# Altium PCB 八入八出继电器工控板.PCBDOC (part 2 of 2)
Units mm, origin at the board's own origin, x right, y up, seen from the top; angles counter-clockwise.
Board outline 152.4 x 101.6 mm, 2 copper layers (Top Layer, Bottom Layer); 79 components, 86 nets, 285 pads, 7 vias.
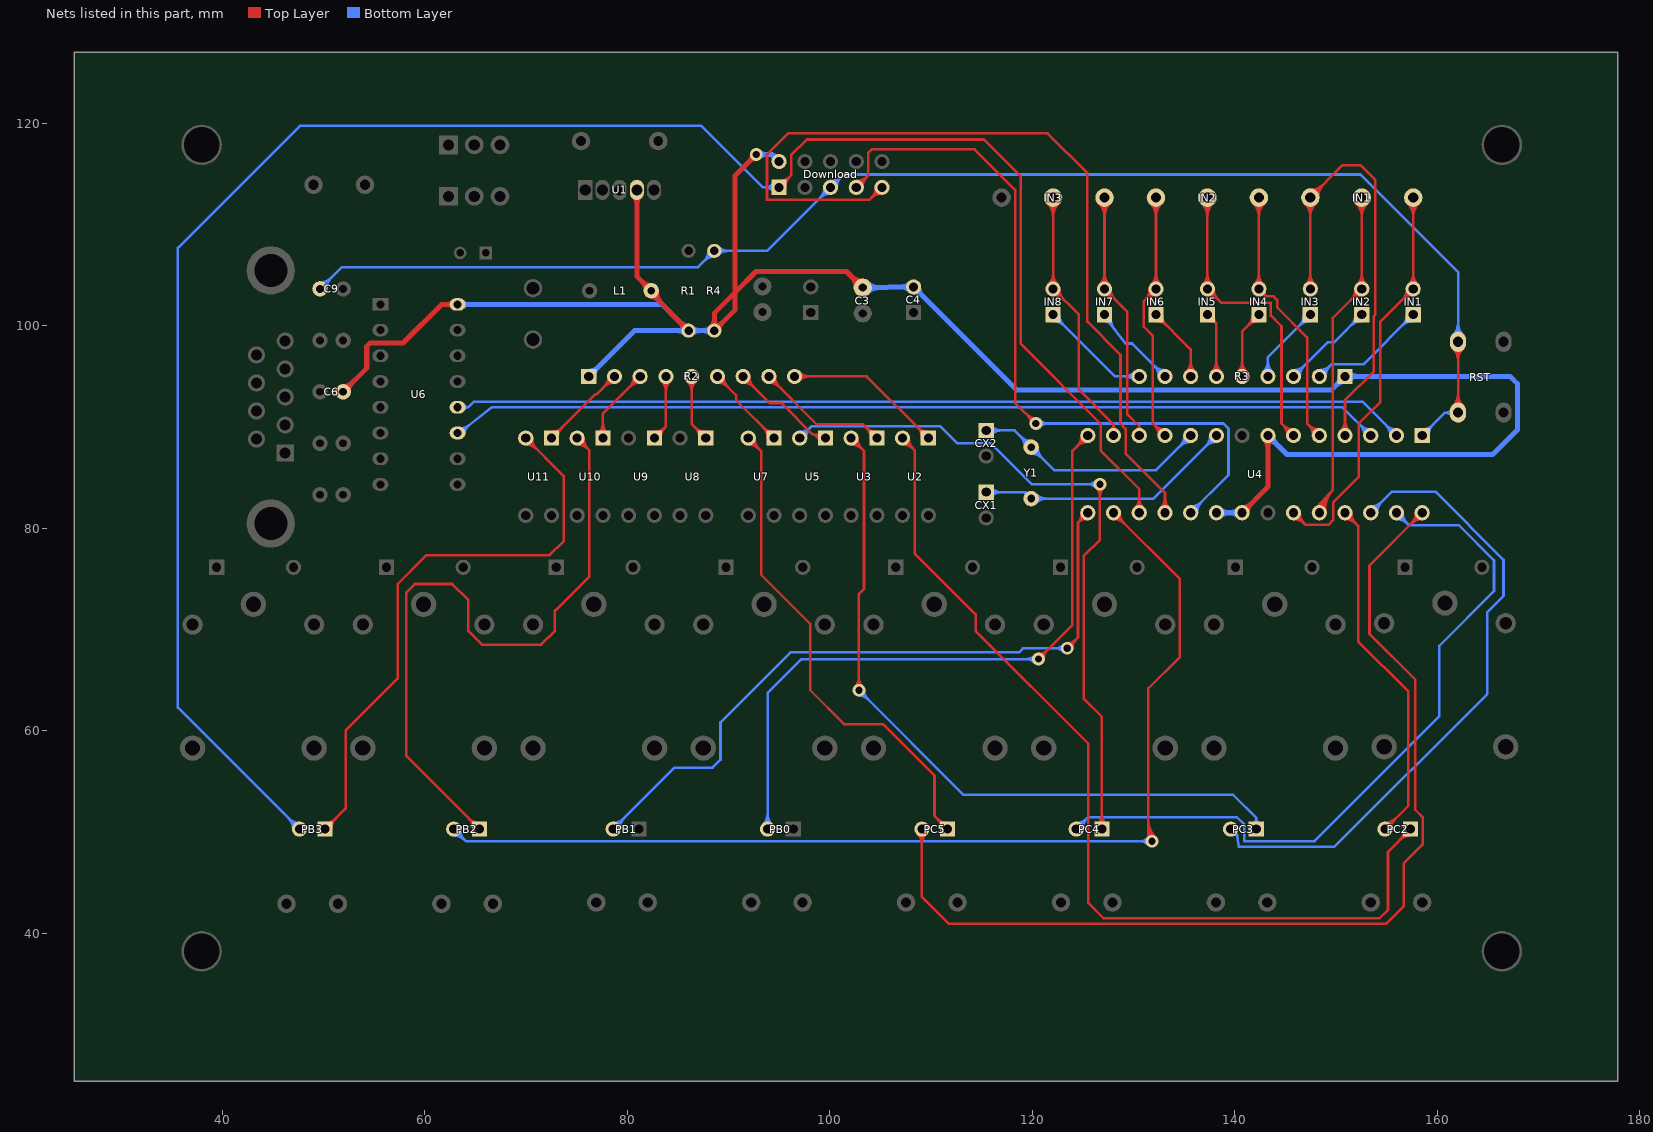
[diagram p2: the nets of this part, all layers, seen from the top]

## Via types
v1: diameter 1.27, hole 0.711, Top Layer to Bottom Layer, 7 vias

## Nets (pads, with @x,y where several pads share a name; then routed paths per layer and width w, separated by ;. In a path a pad name is that pad's centre, name@x,y a point inside that pad or via, vN(x,y) a via of type N, cw(c..) or ccw(c..) an arc to the next point about the centre after c; other vN are vias at no path point) (continued)
NetPB3_1: PB2.1 U10.2 | length 74.7
  Top Layer w0.254: PB2.1@64.782,50.292 ccw(c63.278,50.292) 64.341,51.356 ccw(c65.405,52.419) PB2.1@65.405,50.915 ; PB2.1@65.036,50.292 ccw(c64.145,50.292) 64.775,50.922 ccw(c65.405,51.552) PB2.1@65.405,50.661 ; PB2.1@65.405,50.292 58.191,57.506 58.191,73.66 59.03,74.498 62.713,74.498 64.313,72.898 64.313,69.85 65.659,68.504 71.501,68.504 72.847,69.85 72.847,71.831 76.251,75.235 76.251,87.706 U10.2@75.057,88.9 ; U10.2@75.057,88.277 cw(c75.057,86.773) 76.121,87.836 cw(c77.184,88.9) U10.2@75.68,88.9 ; U10.2@75.057,88.531 cw(c75.057,87.64) 75.687,88.27 cw(c76.317,88.9) U10.2@75.426,88.9
NetPB4_1: PB3.1 U11.2 | length 64.5
  Top Layer w0.254: PB3.1@50.165,50.292 52.197,52.324 52.197,60.02 57.328,65.151 57.328,74.473 60.198,77.343 72.339,77.343 73.711,78.715 73.711,85.166 U11.2@69.977,88.9 ; PB3.1@50.165,50.661 ccw(c50.165,51.552) 50.795,50.922 ccw(c51.425,50.292) PB3.1@50.534,50.292 ; PB3.1@50.165,50.915 ccw(c50.165,52.419) 51.229,51.356 ccw(c52.292,50.292) PB3.1@50.788,50.292 ; U11.2@69.977,88.277 cw(c69.977,86.773) 71.041,87.836 cw(c72.104,88.9) U11.2@70.6,88.9 ; U11.2@69.977,88.531 cw(c69.977,87.64) 70.607,88.27 cw(c71.237,88.9) U11.2@70.346,88.9
NetPC1_1: PC2.1 U2.2 | length 100.5
  Top Layer w0.254: U2.2@107.188,88.277 cw(c107.188,86.773) 108.252,87.836 cw(c109.315,88.9) U2.2@107.811,88.9 ; U2.2@107.188,88.531 cw(c107.188,87.64) 107.818,88.27 cw(c108.448,88.9) U2.2@107.557,88.9 ; U2.2@107.188,88.9 108.382,87.706 108.382,77.521 114.402,71.501 114.402,69.85 125.527,58.725 125.527,42.977 127,41.504 154.305,41.504 155.118,42.316 155.118,48.057 PC2.1@157.353,50.292 ; PC2.1@156.73,50.292 cw(c155.226,50.292) 156.289,49.228 cw(c157.353,48.165) PC2.1@157.353,49.669 ; PC2.1@156.984,50.292 cw(c156.093,50.292) 156.723,49.662 cw(c157.353,49.032) PC2.1@157.353,49.923
NetPC2_1: PC3.1 U3.2 | length 80.2
  Top Layer w0.254: U3.2@102.108,88.277 cw(c102.108,86.773) 103.172,87.836 cw(c104.235,88.9) U3.2@102.731,88.9 ; U3.2@102.108,88.531 cw(c102.108,87.64) 102.738,88.27 cw(c103.368,88.9) U3.2@102.477,88.9 ; U3.2@102.108,88.9 103.378,87.63 103.378,74.016 102.87,73.508 v1(102.87,64.008) ; v1@102.511,64.367 ccw(c101.644,65.234) 102.87,65.234 ccw(c104.096,65.234) v1@103.229,64.367
  Bottom Layer w0.254: v1@102.87,63.5 cw(c102.87,62.274) 103.737,63.141 cw(c104.604,64.008) v1@103.378,64.008 ; v1(102.87,64.008) 113.208,53.67 139.838,53.67 142.113,51.395 ; PC3.1@141.791,50.826 ccw(c141.448,51.395) 142.113,51.395 ; PC3.1@142.113,50.292 142.113,51.395 ; PC3.1@142.435,50.826 cw(c142.778,51.395) 142.113,51.395
NetPC3_1: PC4.1 U5.2 | length 79.4
  Top Layer w0.254: v1@126.311,83.994 cw(c125.443,83.127) 126.67,83.127 cw(c127.896,83.127) v1@127.029,83.994 ; PC4.1@126.432,50.733 ccw(c125.369,51.796) 126.873,51.796 ccw(c128.377,51.796) PC4.1@127.314,50.733 ; PC4.1@126.612,50.553 ccw(c125.982,51.183) 126.873,51.183 ccw(c127.764,51.183) PC4.1@127.134,50.553 ; v1(126.67,84.353) 126.67,78.842 125.07,77.241 125.07,63.195 126.873,61.392 PC4.1@126.873,50.292
  Bottom Layer w0.254: U5.2@97.028,88.9 98.222,90.094 110.896,90.094 112.598,88.392 115.9,88.392 119.939,84.353 v1(126.67,84.353) ; U5.2@97.028,89.269 ccw(c97.028,90.16) 97.658,89.53 ccw(c98.288,88.9) U5.2@97.397,88.9 ; U5.2@97.028,89.523 ccw(c97.028,91.027) 98.092,89.964 ccw(c99.155,88.9) U5.2@97.651,88.9 ; v1@126.311,83.994 ccw(c125.443,83.127) 125.443,84.353 ccw(c125.443,85.58) v1@126.311,84.713
NetPC4_1: PC5.1 U7.2 | length 56.5
  Top Layer w0.254: U7.2@91.948,88.277 cw(c91.948,86.773) 93.012,87.836 cw(c94.075,88.9) U7.2@92.571,88.9 ; U7.2@91.948,88.531 cw(c91.948,87.64) 92.578,88.27 cw(c93.208,88.9) U7.2@92.317,88.9 ; U7.2@91.948,88.9 93.218,87.63 93.218,75.413 98.069,70.561 98.069,64.008 101.422,60.655 105.258,60.655 110.338,55.575 110.338,51.587 PC5.1@111.633,50.292 ; PC5.1@111.01,50.292 ccw(c109.506,50.292) 110.569,51.356 ccw(c111.633,52.419) PC5.1@111.633,50.915 ; PC5.1@111.264,50.292 ccw(c110.373,50.292) 111.003,50.922 ccw(c111.633,51.552) PC5.1@111.633,50.661
NetPD1_1: IN1.1@157.607,101.092 R3.2 | length 19.3
  Bottom Layer w0.254: R3.2@148.336,94.996 149.53,96.19 152.705,96.19 IN1.1@157.607,101.092 ; R3.2@148.336,95.365 ccw(c148.336,96.256) 148.966,95.626 ccw(c149.596,94.996) R3.2@148.705,94.996 ; R3.2@148.336,95.619 ccw(c148.336,97.123) 149.4,96.06 ccw(c150.463,94.996) R3.2@148.959,94.996 ; IN1.1@156.984,101.092 cw(c155.48,101.092) 156.543,100.028 cw(c157.607,98.965) IN1.1@157.607,100.469 ; IN1.1@157.238,101.092 cw(c156.347,101.092) 156.977,100.462 cw(c157.607,99.832) IN1.1@157.607,100.723
NetPD2_1: IN2.1@152.527,101.092 R3.3 | length 16.8
  Bottom Layer w0.254: R3.3@145.796,94.996 149.149,98.349 149.784,98.349 IN2.1@152.527,101.092 ; R3.3@145.796,95.365 ccw(c145.796,96.256) 146.426,95.626 ccw(c147.056,94.996) R3.3@146.165,94.996 ; R3.3@145.796,95.619 ccw(c145.796,97.123) 146.86,96.06 ccw(c147.923,94.996) R3.3@146.419,94.996 ; IN2.1@151.904,101.092 cw(c150.4,101.092) 151.463,100.028 cw(c152.527,98.965) IN2.1@152.527,100.469 ; IN2.1@152.158,101.092 cw(c151.267,101.092) 151.897,100.462 cw(c152.527,99.832) IN2.1@152.527,100.723
NetPD3_1: IN3.1@147.447,101.092 R3.4 | length 15.4
  Bottom Layer w0.254: R3.4@142.815,95.437 ccw(c141.752,96.5) 143.256,96.5 ccw(c144.76,96.5) R3.4@143.697,95.437 ; R3.4@142.995,95.257 ccw(c142.365,95.887) 143.256,95.887 ccw(c144.147,95.887) R3.4@143.517,95.257 ; R3.4@143.256,94.996 143.256,96.901 IN3.1@147.447,101.092 ; IN3.1@146.824,101.092 cw(c145.32,101.092) 146.383,100.028 cw(c147.447,98.965) IN3.1@147.447,100.469 ; IN3.1@147.078,101.092 cw(c146.187,101.092) 146.817,100.462 cw(c147.447,99.832) IN3.1@147.447,100.723
NetPD4_1: IN4.1 R3.5 | length 14.3
  Top Layer w0.254: R3.5@140.275,95.437 ccw(c139.212,96.5) 140.716,96.5 ccw(c142.22,96.5) R3.5@141.157,95.437 ; R3.5@140.455,95.257 ccw(c139.825,95.887) 140.716,95.887 ccw(c141.607,95.887) R3.5@140.977,95.257 ; R3.5@140.716,94.996 140.716,99.441 IN4.1@142.367,101.092 ; IN4.1@141.744,101.092 cw(c140.24,101.092) 141.303,100.028 cw(c142.367,98.965) IN4.1@142.367,100.469 ; IN4.1@141.998,101.092 cw(c141.107,101.092) 141.737,100.462 cw(c142.367,99.832) IN4.1@142.367,100.723
NetPD5_1: IN5.1 R3.6 | length 12
  Top Layer w0.254: IN5.1@137.287,101.092 138.176,100.203 ; IN5.1@137.371,100.475 cw(c137.499,99.526) 138.176,100.203 ; R3.6@137.735,95.437 ccw(c136.672,96.5) 138.176,96.5 ccw(c139.68,96.5) R3.6@138.617,95.437 ; IN5.1@137.904,101.008 ccw(c138.853,100.88) 138.176,100.203 ; R3.6@137.915,95.257 ccw(c137.285,95.887) 138.176,95.887 ccw(c139.067,95.887) R3.6@138.437,95.257 ; R3.6@138.176,94.996 138.176,100.203
NetPD6_1: IN6.1 R3.7 | length 15
  Top Layer w0.254: IN6.1@132.207,100.469 cw(c132.207,98.965) 133.271,100.028 cw(c134.334,101.092) IN6.1@132.83,101.092 ; IN6.1@132.207,100.723 cw(c132.207,99.832) 132.837,100.462 cw(c133.467,101.092) IN6.1@132.576,101.092 ; IN6.1@132.207,101.092 135.636,97.663 R3.7@135.636,94.996 ; R3.7@135.195,95.437 ccw(c134.132,96.5) 135.636,96.5 ccw(c137.14,96.5) R3.7@136.077,95.437 ; R3.7@135.375,95.257 ccw(c134.745,95.887) 135.636,95.887 ccw(c136.527,95.887) R3.7@135.897,95.257
NetPD7_1: IN7.1 R3.8 | length 15.9
  Bottom Layer w0.254: IN7.1@127.051,100.474 cw(c126.913,99.352) 127.804,100.048 ; IN7.1@127.127,101.092 127.127,100.914 129.21,98.247 129.845,98.247 R3.8@133.096,94.996 ; IN7.1@127.493,101.047 ccw(c128.749,100.893) 127.752,100.114 ; IN7.1@127.745,101.016 ccw(c129.609,100.787) 128.129,99.631 ; R3.8@132.473,94.996 ccw(c130.969,94.996) 132.032,96.06 ccw(c133.096,97.123) R3.8@133.096,95.619 ; R3.8@132.727,94.996 ccw(c131.836,94.996) 132.466,95.626 ccw(c133.096,96.256) R3.8@133.096,95.365
NetPD8_1: IN8.1 R3.9 | length 18.6
  Bottom Layer w0.254: IN8.1@122.047,100.469 cw(c122.047,98.965) 123.111,100.028 cw(c124.174,101.092) IN8.1@122.67,101.092 ; IN8.1@122.047,100.723 cw(c122.047,99.832) 122.677,100.462 cw(c123.307,101.092) IN8.1@122.416,101.092 ; IN8.1@122.047,101.092 128.143,94.996 R3.9@130.556,94.996 ; R3.9@130.115,94.555 ccw(c129.052,93.492) 129.052,94.996 ccw(c129.052,96.5) R3.9@130.115,95.437 ; R3.9@130.295,94.735 ccw(c129.665,94.105) 129.665,94.996 ccw(c129.665,95.887) R3.9@130.295,95.257
PB0: PB0.2 U4.14 | length 77
  Top Layer w0.254: v1(120.599,67.081) 123.952,70.434 123.952,87.63 U4.14@125.476,89.154 ; v1@120.599,67.589 ccw(c120.599,68.816) 121.466,67.949 ccw(c122.334,67.081) v1@121.107,67.081 ; U4.14@124.853,89.154 cw(c123.349,89.154) 124.412,88.09 cw(c125.476,87.027) U4.14@125.476,88.531 ; U4.14@125.107,89.154 cw(c124.216,89.154) 124.846,88.524 cw(c125.476,87.894) U4.14@125.476,88.785
  Bottom Layer w0.254: PB0.2@93.412,50.733 ccw(c92.349,51.796) 93.853,51.796 ccw(c95.357,51.796) PB0.2@94.294,50.733 ; PB0.2@93.592,50.553 ccw(c92.962,51.183) 93.853,51.183 ccw(c94.744,51.183) PB0.2@94.114,50.553 ; PB0.2@93.853,50.292 93.853,63.729 97.206,67.081 v1(120.599,67.081) ; v1@120.24,66.722 ccw(c119.373,65.855) 119.373,67.081 ccw(c119.373,68.308) v1@120.24,67.441
PB1: PB1.2 U4.15 | length 79.5
  Top Layer w0.254: v1(123.444,68.148) 124.511,69.215 124.511,80.569 ; v1@123.444,68.656 ccw(c123.444,69.883) 124.311,69.015 ccw(c125.178,68.148) v1@123.952,68.148 ; U4.15@124.855,81.49 cw(c123.674,81.406) 124.511,80.569 ; U4.15@125.108,81.508 cw(c124.409,81.458) 124.904,80.962 cw(c125.4,80.467) U4.15@125.45,81.166 ; U4.15@125.432,80.913 ccw(c125.348,79.732) 124.511,80.569 ; U4.15@125.476,81.534 124.511,80.569
  Bottom Layer w0.254: PB1.2@78.613,50.292 84.684,56.363 88.417,56.363 89.205,57.15 89.205,60.833 96.114,67.742 118.669,67.742 119.075,68.148 v1(123.444,68.148) ; PB1.2@78.613,50.661 ccw(c78.613,51.552) 79.243,50.922 ccw(c79.873,50.292) PB1.2@78.982,50.292 ; PB1.2@78.613,50.915 ccw(c78.613,52.419) 79.677,51.356 ccw(c80.74,50.292) PB1.2@79.236,50.292 ; v1@123.085,67.789 ccw(c122.218,66.922) 122.218,68.148 ccw(c122.218,69.375) v1@123.085,68.507
PB2: PB2.2 U4.16 | length 120
  Top Layer w0.254: U4.16@128.016,80.911 cw(c128.016,79.407) 129.08,80.47 cw(c130.143,81.534) U4.16@128.639,81.534 ; U4.16@128.016,81.165 cw(c128.016,80.274) 128.646,80.904 cw(c129.276,81.534) U4.16@128.385,81.534 ; U4.16@128.016,81.534 134.569,74.981 134.569,67.31 131.445,64.186 131.445,49.479 v1(131.826,49.098) cw(c132.746,50.018) 131.445,50.018 ; 131.445,50.631 ccw(c133.359,50.631) v1@132.006,49.278 ; 131.445,51.244 ccw(c133.972,51.244) v1@132.185,49.457
  Bottom Layer w0.254: PB2.2@62.865,49.669 cw(c62.865,48.165) 63.929,49.228 cw(c64.992,50.292) PB2.2@63.488,50.292 ; PB2.2@62.865,49.923 cw(c62.865,49.032) 63.495,49.662 cw(c64.125,50.292) PB2.2@63.234,50.292 ; PB2.2@62.865,50.292 64.059,49.098 v1(131.826,49.098) ; v1@131.467,48.739 ccw(c130.6,47.872) 130.6,49.098 ccw(c130.6,50.325) v1@131.467,49.457
PB3: Download.1 PB3.2 U4.17 | length 210.8
  Top Layer w0.254: Download.1@94.996,113.665 96.19,114.859 96.19,116.84 97.739,118.389 115.214,118.389 118.86,114.744 118.86,98.208 126.746,90.322 126.746,87.681 130.556,83.871 U4.17@130.556,81.534 ; Download.1@94.996,114.034 ccw(c94.996,114.925) 95.626,114.295 ccw(c96.256,113.665) Download.1@95.365,113.665 ; Download.1@94.996,114.288 ccw(c94.996,115.792) 96.06,114.729 ccw(c97.123,113.665) Download.1@95.619,113.665 ; U4.17@130.115,81.975 ccw(c129.052,83.038) 130.556,83.038 ccw(c132.06,83.038) U4.17@130.997,81.975 ; U4.17@130.295,81.795 ccw(c129.665,82.425) 130.556,82.425 ccw(c131.447,82.425) U4.17@130.817,81.795
  Bottom Layer w0.254: PB3.2@47.002,50.292 ccw(c45.498,50.292) 46.561,51.356 ccw(c47.625,52.419) PB3.2@47.625,50.915 ; PB3.2@47.256,50.292 ccw(c46.365,50.292) 46.995,50.922 ccw(c47.625,51.552) PB3.2@47.625,50.661 ; PB3.2@47.625,50.292 35.636,62.281 35.636,107.696 47.676,119.736 87.319,119.736 93.39,113.665 Download.1@94.996,113.665 ; Download.1@94.555,113.224 ccw(c93.492,112.161) 93.492,113.665 ccw(c93.492,115.169) Download.1@94.555,114.106 ; Download.1@94.735,113.404 ccw(c94.105,112.774) 94.105,113.665 ccw(c94.105,114.556) Download.1@94.735,113.926
PB4: Download.9 U4.18 | length 94.7
  Top Layer w0.254: Download.9@104.533,113.665 cw(c103.029,113.665) 104.092,112.601 cw(c105.156,111.538) Download.9@105.156,113.042 ; Download.9@104.787,113.665 cw(c103.896,113.665) 104.526,113.035 cw(c105.156,112.405) Download.9@105.156,113.296 ; Download.9@105.156,113.665 103.937,112.446 93.802,112.446 93.802,116.916 95.885,118.999 121.514,118.999 125.425,115.087 125.425,100.406 128.702,97.13 128.702,90.322 129.21,89.814 129.21,87.376 133.096,83.49 U4.18@133.096,81.534 ; U4.18@132.655,81.975 ccw(c131.592,83.038) 133.096,83.038 ccw(c134.6,83.038) U4.18@133.537,81.975 ; U4.18@132.835,81.795 ccw(c132.205,82.425) 133.096,82.425 ccw(c133.987,82.425) U4.18@133.357,81.795
PB5: Download.7 U4.19 | length 84.6
  Top Layer w0.254: Download.7@102.616,113.665 103.81,114.859 103.81,117.094 104.14,117.424 114.3,117.424 118.306,113.418 118.306,92.387 v1(120.345,90.348) ; Download.7@102.616,114.034 ccw(c102.616,114.925) 103.246,114.295 ccw(c103.876,113.665) Download.7@102.985,113.665 ; Download.7@102.616,114.288 ccw(c102.616,115.792) 103.68,114.729 ccw(c104.743,113.665) Download.7@103.239,113.665 ; v1@119.837,90.348 ccw(c118.611,90.348) 119.478,91.215 ccw(c120.345,92.082) v1@120.345,90.856
  Bottom Layer w0.254: v1(120.345,90.348) 138.874,90.348 139.37,89.852 139.37,85.268 U4.19@135.636,81.534 ; v1@120.704,89.989 cw(c121.572,89.121) 121.572,90.348 cw(c121.572,91.574) v1@120.704,90.707 ; U4.19@135.636,81.903 ccw(c135.636,82.794) 136.266,82.164 ccw(c136.896,81.534) U4.19@136.005,81.534 ; U4.19@135.636,82.157 ccw(c135.636,83.661) 136.7,82.598 ccw(c137.763,81.534) U4.19@136.259,81.534
PB6: CX1.1 U4.9 Y1.2 | length 37.7
  Bottom Layer w0.254: CX1.1@115.443,83.566 119.253,83.566 ; CX1.1@115.704,83.305 cw(c116.334,82.675) 116.334,83.566 cw(c116.334,84.457) CX1.1@115.704,83.827 ; CX1.1@115.884,83.125 cw(c116.947,82.062) 116.947,83.566 cw(c116.947,85.07) CX1.1@115.884,84.007 ; Y1.2@119.315,83.205 ccw(c119.029,83.342) 119.253,83.566 ; Y1.2@119.614,83.504 cw(c119.477,83.79) 119.253,83.566 ; Y1.2@120.157,82.662 cw(c120.808,82.011) 120.808,82.931 cw(c120.808,83.851) Y1.2@120.157,83.2 ; Y1.2@120.337,82.482 cw(c121.421,81.398) 121.421,82.931 cw(c121.421,84.464) Y1.2@120.337,83.38 ; U4.9@137.553,89.154 cw(c136.049,89.154) 137.112,88.09 cw(c138.176,87.027) U4.9@138.176,88.531 ; U4.9@137.807,89.154 cw(c136.916,89.154) 137.546,88.524 cw(c138.176,87.894) U4.9@138.176,88.785 ; U4.9@138.176,89.154 131.953,82.931 Y1.2@119.888,82.931 119.253,83.566
PB7: CX2.1 U4.10 Y1.1 | length 38.5
  Bottom Layer w0.254: CX2.1@115.443,89.662 118.237,89.662 Y1.1@119.888,88.011 122.149,85.75 132.232,85.75 U4.10@135.636,89.154 ; CX2.1@115.704,89.401 cw(c116.334,88.771) 116.334,89.662 cw(c116.334,90.553) CX2.1@115.704,89.923 ; CX2.1@115.884,89.221 cw(c116.947,88.158) 116.947,89.662 cw(c116.947,91.166) CX2.1@115.884,90.103 ; Y1.1@119.253,88.011 ccw(c117.72,88.011) 118.804,89.095 ccw(c119.888,90.179) Y1.1@119.888,88.646 ; Y1.1@119.507,88.011 ccw(c118.587,88.011) 119.238,88.661 ccw(c119.888,89.312) Y1.1@119.888,88.392 ; Y1.1@119.888,87.376 cw(c119.888,85.843) 120.972,86.927 cw(c122.056,88.011) Y1.1@120.523,88.011 ; Y1.1@119.888,87.63 cw(c119.888,86.71) 120.538,87.361 cw(c121.189,88.011) Y1.1@120.269,88.011 ; U4.10@135.013,89.154 cw(c133.509,89.154) 134.572,88.09 cw(c135.636,87.027) U4.10@135.636,88.531 ; U4.10@135.267,89.154 cw(c134.376,89.154) 135.006,88.524 cw(c135.636,87.894) U4.10@135.636,88.785
PC0: IN1.1@157.607,112.649 IN1.2@157.607,103.632 U4.23 | length 56
  Top Layer w0.254: U4.23@145.796,80.911 cw(c145.796,79.407) 146.86,80.47 cw(c147.923,81.534) U4.23@146.419,81.534 ; U4.23@145.796,81.165 cw(c145.796,80.274) 146.426,80.904 cw(c147.056,81.534) U4.23@146.165,81.534 ; U4.23@145.796,81.534 146.99,80.34 149.225,80.34 149.699,80.814 149.699,82.55 152.222,85.073 152.222,90.322 154.335,92.435 154.335,100.36 IN1.2@157.607,103.632 IN1.1@157.607,112.649 ; IN1.2@156.984,103.632 cw(c155.48,103.632) 156.543,102.568 cw(c157.607,101.505) IN1.2@157.607,103.009 ; IN1.1@157.052,112.094 cw(c155.712,110.754) 157.607,110.754 cw(c159.502,110.754) IN1.1@158.162,112.094 ; IN1.2@157.166,104.073 ccw(c156.103,105.136) 157.607,105.136 ccw(c159.111,105.136) IN1.2@158.048,104.073 ; IN1.1@157.232,112.274 cw(c156.325,111.367) 157.607,111.367 cw(c158.889,111.367) IN1.1@157.982,112.274 ; IN1.2@157.238,103.632 cw(c156.347,103.632) 156.977,103.002 cw(c157.607,102.372) IN1.2@157.607,103.263 ; IN1.2@157.346,103.893 ccw(c156.716,104.523) 157.607,104.523 ccw(c158.498,104.523) IN1.2@157.868,103.893
PC1: IN1.2@152.527,112.649 IN2.2@152.527,103.632 U4.24 | length 53
  Top Layer w0.254: U4.24@148.164,82.133 ccw(c148.099,82.361) 148.336,82.361 ; U4.24@148.198,81.517 cw(c149.511,81.68) 148.544,82.584 ; U4.24@148.336,81.534 148.336,82.361 ; U4.24@148.45,81.548 cw(c150.213,81.768) 148.915,82.981 ; U4.24@148.508,82.133 cw(c148.573,82.361) 148.336,82.361 ; U4.24@148.702,81.58 cw(c150.915,81.855) 149.285,83.377 ; U4.24@148.954,81.611 cw(c151.616,81.943) 149.656,83.774 ; IN2.2@151.904,103.632 cw(c150.4,103.632) 151.463,102.568 cw(c152.527,101.505) IN2.2@152.527,103.009 ; IN1.2@151.972,112.094 cw(c150.632,110.754) 152.527,110.754 cw(c154.422,110.754) IN1.2@153.082,112.094 ; IN2.2@152.086,104.073 ccw(c151.023,105.136) 152.527,105.136 ccw(c154.031,105.136) IN2.2@152.968,104.073 ; IN1.2@152.152,112.274 cw(c151.245,111.367) 152.527,111.367 cw(c153.809,111.367) IN1.2@152.902,112.274 ; IN2.2@152.158,103.632 cw(c151.267,103.632) 151.897,103.002 cw(c152.527,102.372) IN2.2@152.527,103.263 ; IN2.2@152.266,103.893 ccw(c151.636,104.523) 152.527,104.523 ccw(c153.418,104.523) IN2.2@152.788,103.893 ; IN1.2@152.527,112.649 IN2.2@152.527,103.632 149.682,100.787 149.682,83.802 148.336,82.361
PC2: PC2.2 U4.25 | length 42.3
  Top Layer w0.254: U4.25@150.876,80.911 cw(c150.876,79.407) 151.94,80.47 cw(c153.003,81.534) U4.25@151.499,81.534 ; U4.25@150.876,81.165 cw(c150.876,80.274) 151.506,80.904 cw(c152.136,81.534) U4.25@151.245,81.534 ; U4.25@150.876,81.534 152.171,80.239 152.171,68.834 157.124,63.881 157.124,52.603 PC2.2@154.813,50.292 ; PC2.2@154.813,50.661 ccw(c154.813,51.552) 155.443,50.922 ccw(c156.073,50.292) PC2.2@155.182,50.292 ; PC2.2@154.813,50.915 ccw(c154.813,52.419) 155.877,51.356 ccw(c156.94,50.292) PC2.2@155.436,50.292
PC3: PC3.2 U4.26 | length 68.2
  Bottom Layer w0.254: PC3.2@139.573,50.292 140.25,49.615 ; PC3.2@139.797,49.711 cw(c139.95,49.314) 140.25,49.615 ; PC3.2@140.154,50.068 ccw(c140.551,49.915) 140.25,49.615 ; U4.26@153.416,81.534 155.499,83.617 159.791,83.617 166.522,76.886 166.522,73.312 164.922,71.711 164.922,63.652 149.831,48.561 140.382,48.561 140.25,49.615 ; U4.26@153.416,81.903 ccw(c153.416,82.794) 154.046,82.164 ccw(c154.676,81.534) U4.26@153.785,81.534 ; U4.26@153.416,82.157 ccw(c153.416,83.661) 154.48,82.598 ccw(c155.543,81.534) U4.26@154.039,81.534
PC4: PC4.2 U4.27 | length 80.1
  Bottom Layer w0.254: PC4.2@124.333,50.292 125.527,51.486 140.183,51.486 140.936,50.732 140.936,49.115 147.87,49.115 160.198,61.443 160.198,68.402 165.583,73.787 165.583,76.835 162.103,80.315 157.175,80.315 U4.27@155.956,81.534 ; PC4.2@124.333,50.661 ccw(c124.333,51.552) 124.963,50.922 ccw(c125.593,50.292) PC4.2@124.702,50.292 ; PC4.2@124.333,50.915 ccw(c124.333,52.419) 125.397,51.356 ccw(c126.46,50.292) PC4.2@124.956,50.292 ; U4.27@155.956,80.911 cw(c155.956,79.407) 157.02,80.47 cw(c158.083,81.534) U4.27@156.579,81.534 ; U4.27@155.956,81.165 cw(c155.956,80.274) 156.586,80.904 cw(c157.216,81.534) U4.27@156.325,81.534
PC5: PC5.2 U4.28 | length 107.6
  Top Layer w0.254: PC5.2@108.652,49.851 cw(c107.589,48.788) 109.093,48.788 cw(c110.597,48.788) PC5.2@109.534,49.851 ; PC5.2@108.832,50.031 cw(c108.202,49.401) 109.093,49.401 cw(c109.984,49.401) PC5.2@109.354,50.031 ; PC5.2@109.093,50.292 109.093,43.612 111.76,40.945 154.94,40.945 156.693,42.697 156.693,46.939 158.53,48.777 158.53,51.486 157.81,52.206 157.81,65.049 153.289,69.571 153.289,76.327 U4.28@158.496,81.534 ; U4.28@157.873,81.534 cw(c156.369,81.534) 157.432,80.47 cw(c158.496,79.407) U4.28@158.496,80.911 ; U4.28@158.127,81.534 cw(c157.236,81.534) 157.866,80.904 cw(c158.496,80.274) U4.28@158.496,81.165
PC6: C9.1 Download.5 R4.1 RST.1 U4.1 | length 175.4
  Top Layer w0.254: RST.1@161.561,92.093 ccw(c160.412,93.242) 162.037,93.242 ccw(c163.662,93.242) RST.1@162.513,92.093 ; RST.1@161.561,97.741 cw(c160.412,96.592) 162.037,96.592 cw(c163.662,96.592) RST.1@162.513,97.741 ; RST.1@161.741,91.913 ccw(c161.026,92.629) 162.037,92.629 ccw(c163.049,92.629) RST.1@162.333,91.913 ; RST.1@161.741,97.921 cw(c161.026,97.205) 162.037,97.205 cw(c163.049,97.205) RST.1@162.333,97.921 ; RST.1@162.037,91.417 RST.1@162.037,98.417
  Bottom Layer w0.254: C9.1@49.657,103.632 51.816,105.791 86.995,105.791 R4.1@88.595,107.391 93.802,107.391 Download.5@100.076,113.665 101.346,114.935 152.4,114.935 162.037,105.298 RST.1@162.037,98.417 ; C9.1@49.657,104.013 ccw(c49.657,104.933) 50.307,104.282 ccw(c50.958,103.632) C9.1@50.038,103.632 ; C9.1@49.657,104.267 ccw(c49.657,105.8) 50.741,104.716 ccw(c51.825,103.632) C9.1@50.292,103.632 ; R4.1@88.022,107.391 cw(c86.639,107.391) 87.617,106.413 cw(c88.595,105.435) R4.1@88.595,106.818 ; R4.1@88.276,107.391 cw(c87.506,107.391) 88.051,106.847 cw(c88.595,106.302) R4.1@88.595,107.072 ; R4.1@88.821,107.166 cw(c89.365,106.621) 89.365,107.391 cw(c89.365,108.161) R4.1@88.821,107.617 ; R4.1@89,106.986 cw(c89.979,106.008) 89.979,107.391 cw(c89.979,108.775) R4.1@89,107.796 ; Download.5@99.453,113.665 cw(c97.949,113.665) 99.012,112.601 cw(c100.076,111.538) Download.5@100.076,113.042 ; Download.5@99.707,113.665 cw(c98.816,113.665) 99.446,113.035 cw(c100.076,112.405) Download.5@100.076,113.296 ; Download.5@100.076,114.034 ccw(c100.076,114.925) 100.706,114.295 ccw(c101.336,113.665) Download.5@100.445,113.665 ; Download.5@100.076,114.288 ccw(c100.076,115.792) 101.14,114.729 ccw(c102.203,113.665) Download.5@100.699,113.665 ; U4.1@158.496,89.154 160.759,91.417 ; U4.1@158.496,89.523 ccw(c158.496,90.414) 159.126,89.784 ccw(c159.756,89.154) U4.1@158.865,89.154 ; U4.1@158.496,89.777 ccw(c158.496,91.281) 159.56,90.218 ccw(c160.623,89.154) U4.1@159.119,89.154 ; RST.1@161.482,91.036 ccw(c160.759,90.54) 160.759,91.417 ; RST.1@161.482,91.798 cw(c160.759,92.294) 160.759,91.417 ; RST.1@161.561,99.093 ccw(c160.412,100.242) 162.037,100.242 ccw(c163.662,100.242) RST.1@162.513,99.093 ; RST.1@161.741,98.913 ccw(c161.026,99.629) 162.037,99.629 ccw(c163.049,99.629) RST.1@162.333,98.913 ; RST.1@162.037,91.417 160.759,91.417
PD0: U4.2 U6.12 | length 99.2
  Bottom Layer w0.254: U6.12@63.242,91.947 64.286,91.947 ; U6.12@63.831,91.69 cw(c64.286,91.415) 64.286,91.947 ; U6.12@63.831,92.204 ccw(c64.286,92.479) 64.286,91.947 ; U4.2@155.333,89.154 ccw(c153.829,89.154) 154.892,90.218 ccw(c155.956,91.281) U4.2@155.956,89.777 ; U4.2@155.587,89.154 ccw(c154.696,89.154) 155.326,89.784 ccw(c155.956,90.414) U4.2@155.956,89.523 ; U4.2@155.956,89.154 152.603,92.507 64.846,92.507 64.286,91.947
PD1: U4.3 U6.11 | length 97.9
  Bottom Layer w0.254: U6.11@63.242,89.407 63.417,89.407 66.624,91.948 150.622,91.948 U4.3@153.416,89.154 ; U6.11@63.462,89.902 ccw(c63.603,91.123) 64.367,90.159 ; U6.11@63.899,89.35 cw(c65.067,89.214) 64.337,90.136 ; U4.3@152.793,89.154 ccw(c151.289,89.154) 152.352,90.218 ccw(c153.416,91.281) U4.3@153.416,89.777 ; U4.3@153.047,89.154 ccw(c152.156,89.154) 152.786,89.784 ccw(c153.416,90.414) U4.3@153.416,89.523
PD2: IN1.3 IN3.2@147.447,103.632 U4.4 | length 61.3
  Top Layer w0.254: IN1.3@146.892,112.094 cw(c145.552,110.754) 147.447,110.754 cw(c149.342,110.754) IN1.3@148.002,112.094 ; IN3.2@147.006,104.073 ccw(c145.943,105.136) 147.447,105.136 ccw(c148.951,105.136) IN3.2@147.888,104.073 ; IN1.3@147.072,112.274 cw(c146.165,111.367) 147.447,111.367 cw(c148.729,111.367) IN1.3@147.822,112.274 ; IN3.2@147.186,103.893 ccw(c146.556,104.523) 147.447,104.523 ccw(c148.338,104.523) IN3.2@147.708,103.893 ; IN3.2@147.447,103.632 IN1.3@147.447,112.649 150.647,115.849 152.4,115.849 153.873,114.376 153.873,101.092 153.721,100.94 153.721,95.495 150.876,92.651 U4.4@150.876,89.154 ; IN1.3@147.447,113.18 ccw(c147.447,114.462) 148.353,113.555 ccw(c149.26,112.649) IN1.3@147.978,112.649 ; IN1.3@147.447,113.434 ccw(c147.447,115.329) 148.787,113.989 ccw(c150.127,112.649) IN1.3@148.232,112.649 ; U4.4@150.435,89.595 ccw(c149.372,90.658) 150.876,90.658 ccw(c152.38,90.658) U4.4@151.317,89.595 ; U4.4@150.615,89.415 ccw(c149.985,90.045) 150.876,90.045 ccw(c151.767,90.045) U4.4@151.137,89.415
PD3: IN2.1@142.367,112.649 IN4.2 U4.5 | length 40.1
  Top Layer w0.254: IN2.1@141.812,112.094 cw(c140.472,110.754) 142.367,110.754 cw(c144.262,110.754) IN2.1@142.922,112.094 ; IN4.2@141.926,104.073 ccw(c140.863,105.136) 142.367,105.136 ccw(c143.871,105.136) IN4.2@142.808,104.073 ; IN2.1@141.992,112.274 cw(c141.085,111.367) 142.367,111.367 cw(c143.649,111.367) IN2.1@142.742,112.274 ; IN4.2@142.106,103.893 ccw(c141.476,104.523) 142.367,104.523 ccw(c143.258,104.523) IN4.2@142.628,103.893 ; IN2.1@142.367,112.649 IN4.2@142.367,103.632 143.099,102.9 ; IN4.2@142.55,103.037 cw(c142.711,102.513) 143.099,102.9 ; IN4.2@142.962,103.449 ccw(c143.486,103.288) 143.099,102.9 ; U4.5@147.713,89.154 ccw(c146.209,89.154) 147.272,90.218 ccw(c148.336,91.281) U4.5@148.336,89.777 ; U4.5@147.967,89.154 ccw(c147.076,89.154) 147.706,89.784 ccw(c148.336,90.414) U4.5@148.336,89.523 ; U4.5@148.336,89.154 147.142,90.348 147.142,98.857 144.175,101.824 144.175,102.552 143.827,102.9 143.099,102.9
PD4: IN2.2@137.287,112.649 IN5.2 U4.6 | length 46.2
  Top Layer w0.254: IN2.2@136.732,112.094 cw(c135.392,110.754) 137.287,110.754 cw(c139.182,110.754) IN2.2@137.842,112.094 ; IN5.2@136.846,104.073 ccw(c135.783,105.136) 137.287,105.136 ccw(c138.791,105.136) IN5.2@137.728,104.073 ; IN2.2@136.912,112.274 cw(c136.005,111.367) 137.287,111.367 cw(c138.569,111.367) IN2.2@137.662,112.274 ; IN5.2@137.026,103.893 ccw(c136.396,104.523) 137.287,104.523 ccw(c138.178,104.523) IN5.2@137.548,103.893 ; IN5.2@137.287,103.009 cw(c137.287,101.505) 138.351,102.568 cw(c139.414,103.632) IN5.2@137.91,103.632 ; IN5.2@137.287,103.263 cw(c137.287,102.372) 137.917,103.002 cw(c138.547,103.632) IN5.2@137.656,103.632 ; IN2.2@137.287,112.649 IN5.2@137.287,103.632 138.633,102.286 143.561,102.286 143.561,100.99 144.602,99.949 144.602,90.348 U4.6@145.796,89.154 ; U4.6@145.173,89.154 ccw(c143.669,89.154) 144.732,90.218 ccw(c145.796,91.281) U4.6@145.796,89.777 ; U4.6@145.427,89.154 ccw(c144.536,89.154) 145.166,89.784 ccw(c145.796,90.414) U4.6@145.796,89.523
PD5: IN2.3 IN6.2 U4.11 | length 41.1
  Top Layer w0.254: IN6.2@131.584,103.632 cw(c130.08,103.632) 131.143,102.568 cw(c132.207,101.505) IN6.2@132.207,103.009 ; IN2.3@131.652,112.094 cw(c130.312,110.754) 132.207,110.754 cw(c134.102,110.754) IN2.3@132.762,112.094 ; IN6.2@131.766,104.073 ccw(c130.703,105.136) 132.207,105.136 ccw(c133.711,105.136) IN6.2@132.648,104.073 ; IN2.3@131.832,112.274 cw(c130.925,111.367) 132.207,111.367 cw(c133.489,111.367) IN2.3@132.582,112.274 ; IN6.2@131.838,103.632 cw(c130.947,103.632) 131.577,103.002 cw(c132.207,102.372) IN6.2@132.207,103.263 ; IN6.2@131.946,103.893 ccw(c131.316,104.523) 132.207,104.523 ccw(c133.098,104.523) IN6.2@132.468,103.893 ; IN2.3@132.207,112.649 IN6.2@132.207,103.632 131.013,102.438 131.013,99.898 131.902,99.009 131.902,90.348 U4.11@133.096,89.154 ; U4.11@132.473,89.154 ccw(c130.969,89.154) 132.032,90.218 ccw(c133.096,91.281) U4.11@133.096,89.777 ; U4.11@132.727,89.154 ccw(c131.836,89.154) 132.466,89.784 ccw(c133.096,90.414) U4.11@133.096,89.523
PD6: IN3.1@127.127,112.649 IN7.2 U4.12 | length 38.3
  Top Layer w0.254: IN3.1@126.572,112.094 cw(c125.232,110.754) 127.127,110.754 cw(c129.022,110.754) IN3.1@127.682,112.094 ; IN7.2@126.686,104.073 ccw(c125.623,105.136) 127.127,105.136 ccw(c128.631,105.136) IN7.2@127.568,104.073 ; IN3.1@126.752,112.274 cw(c125.845,111.367) 127.127,111.367 cw(c128.409,111.367) IN3.1@127.502,112.274 ; IN7.2@126.866,103.893 ccw(c126.236,104.523) 127.127,104.523 ccw(c128.018,104.523) IN7.2@127.388,103.893 ; IN7.2@127.127,103.009 cw(c127.127,101.505) 128.191,102.568 cw(c129.254,103.632) IN7.2@127.75,103.632 ; IN7.2@127.127,103.263 cw(c127.127,102.372) 127.757,103.002 cw(c128.387,103.632) IN7.2@127.496,103.632 ; IN3.1@127.127,112.649 IN7.2@127.127,103.632 129.362,101.397 129.362,91.27 130.556,90.076 ; U4.12@130.324,89.732 ccw(c130.185,90.076) 130.556,90.076 ; U4.12@130.556,89.154 130.556,90.076 ; U4.12@130.788,89.732 cw(c130.927,90.076) 130.556,90.076
PD7: IN3.2@122.047,112.649 IN8.2 U4.13 | length 39.8
  Top Layer w0.254: IN3.2@121.492,112.094 cw(c120.152,110.754) 122.047,110.754 cw(c123.942,110.754) IN3.2@122.602,112.094 ; IN8.2@121.606,104.073 ccw(c120.543,105.136) 122.047,105.136 ccw(c123.551,105.136) IN8.2@122.488,104.073 ; IN3.2@121.672,112.274 cw(c120.765,111.367) 122.047,111.367 cw(c123.329,111.367) IN3.2@122.422,112.274 ; IN8.2@121.786,103.893 ccw(c121.156,104.523) 122.047,104.523 ccw(c122.938,104.523) IN8.2@122.308,103.893 ; IN8.2@122.047,103.009 cw(c122.047,101.505) 123.111,102.568 cw(c124.174,103.632) IN8.2@122.67,103.632 ; IN8.2@122.047,103.263 cw(c122.047,102.372) 122.677,103.002 cw(c123.307,103.632) IN8.2@122.416,103.632 ; IN3.2@122.047,112.649 IN8.2@122.047,103.632 124.587,101.092 124.587,93.686 128.016,90.257 ; U4.13@127.694,89.688 ccw(c127.351,90.257) 128.016,90.257 ; U4.13@128.016,89.154 128.016,90.257 ; U4.13@128.338,89.688 cw(c128.681,90.257) 128.016,90.257
Q1: R2.9 U2.1 | length 23.3
  Top Layer w0.254: R2.9@96.52,94.996 103.632,94.996 U2.1@109.728,88.9 ; R2.9@96.781,94.735 cw(c97.411,94.105) 97.411,94.996 cw(c97.411,95.887) R2.9@96.781,95.257 ; R2.9@96.961,94.555 cw(c98.024,93.492) 98.024,94.996 cw(c98.024,96.5) R2.9@96.961,95.437 ; U2.1@109.105,88.9 ccw(c107.601,88.9) 108.664,89.964 ccw(c109.728,91.027) U2.1@109.728,89.523 ; U2.1@109.359,88.9 ccw(c108.468,88.9) 109.098,89.53 ccw(c109.728,90.16) U2.1@109.728,89.269
Q2: R2.8 U3.1 | length 20.7
  Top Layer w0.254: R2.8@93.98,94.373 cw(c93.98,92.869) 95.044,93.932 cw(c96.107,94.996) R2.8@94.603,94.996 ; R2.8@93.98,94.627 cw(c93.98,93.736) 94.61,94.366 cw(c95.24,94.996) R2.8@94.349,94.996 ; R2.8@93.98,94.996 98.704,90.272 103.276,90.272 U3.1@104.648,88.9 ; U3.1@104.025,88.9 ccw(c102.521,88.9) 103.584,89.964 ccw(c104.648,91.027) U3.1@104.648,89.523 ; U3.1@104.279,88.9 ccw(c103.388,88.9) 104.018,89.53 ccw(c104.648,90.16) U3.1@104.648,89.269
Q3: R2.7 U5.1 | length 17.3
  Top Layer w0.254: R2.7@91.44,94.373 cw(c91.44,92.869) 92.504,93.932 cw(c93.567,94.996) R2.7@92.063,94.996 ; R2.7@91.44,94.627 cw(c91.44,93.736) 92.07,94.366 cw(c92.7,94.996) R2.7@91.809,94.996 ; R2.7@91.44,94.996 94.107,92.329 95.264,92.329 98.311,89.282 ; U5.1@98.992,88.663 ccw(c97.999,88.254) 98.311,89.282 ; U5.1@99.221,89.417 cw(c98.623,90.309) 98.311,89.282 ; U5.1@99.227,88.76 ccw(c98.639,88.518) 98.823,89.126 ccw(c99.008,89.735) U5.1@99.362,89.206 ; U5.1@99.568,88.9 98.311,89.282
Q4: R2.6 U7.1 | length 15.9
  Top Layer w0.254: R2.6@88.9,94.373 cw(c88.9,92.869) 89.964,93.932 cw(c91.027,94.996) R2.6@89.523,94.996 ; R2.6@88.9,94.627 cw(c88.9,93.736) 89.53,94.366 cw(c90.16,94.996) R2.6@89.269,94.996 ; R2.6@88.9,94.996 90.764,93.132 90.764,92.624 U7.1@94.488,88.9 ; U7.1@93.865,88.9 ccw(c92.361,88.9) 93.424,89.964 ccw(c94.488,91.027) U7.1@94.488,89.523 ; U7.1@94.119,88.9 ccw(c93.228,88.9) 93.858,89.53 ccw(c94.488,90.16) U7.1@94.488,89.269
Q5: R2.5 U8.1 | length 14.2
  Top Layer w0.254: R2.5@85.919,94.555 cw(c84.856,93.492) 86.36,93.492 cw(c87.864,93.492) R2.5@86.801,94.555 ; R2.5@86.099,94.735 cw(c85.469,94.105) 86.36,94.105 cw(c87.251,94.105) R2.5@86.621,94.735 ; R2.5@86.36,94.996 86.36,90.297 U8.1@87.757,88.9 ; U8.1@87.134,88.9 ccw(c85.63,88.9) 86.693,89.964 ccw(c87.757,91.027) U8.1@87.757,89.523 ; U8.1@87.388,88.9 ccw(c86.497,88.9) 87.127,89.53 ccw(c87.757,90.16) U8.1@87.757,89.269
Q6: R2.4 U9.1 | length 14.1
  Top Layer w0.254: U9.1@82.677,88.9 83.82,90.043 R2.4@83.82,94.996 ; U9.1@82.677,89.269 ccw(c82.677,90.16) 83.307,89.53 ccw(c83.937,88.9) U9.1@83.046,88.9 ; U9.1@82.677,89.523 ccw(c82.677,91.027) 83.741,89.964 ccw(c84.804,88.9) U9.1@83.3,88.9 ; R2.4@83.379,94.555 cw(c82.316,93.492) 83.82,93.492 cw(c85.324,93.492) R2.4@84.261,94.555 ; R2.4@83.559,94.735 cw(c82.929,94.105) 83.82,94.105 cw(c84.711,94.105) R2.4@84.081,94.735
Q7: R2.3 U10.1 | length 15.1
  Top Layer w0.254: U10.1@77.156,89.341 ccw(c76.093,90.404) 77.597,90.404 ccw(c79.101,90.404) U10.1@78.038,89.341 ; U10.1@77.336,89.161 ccw(c76.706,89.791) 77.597,89.791 ccw(c78.488,89.791) U10.1@77.858,89.161 ; U10.1@77.597,88.9 77.597,91.313 R2.3@81.28,94.996 ; R2.3@80.657,94.996 cw(c79.153,94.996) 80.216,93.932 cw(c81.28,92.869) R2.3@81.28,94.373 ; R2.3@80.911,94.996 cw(c80.02,94.996) 80.65,94.366 cw(c81.28,93.736) R2.3@81.28,94.627
Q8: R2.2 U11.1 | length 16.3
  Top Layer w0.254: U11.1@72.517,88.9 76.835,93.218 76.962,93.218 R2.2@78.74,94.996 ; U11.1@72.517,89.269 ccw(c72.517,90.16) 73.147,89.53 ccw(c73.777,88.9) U11.1@72.886,88.9 ; U11.1@72.517,89.523 ccw(c72.517,91.027) 73.581,89.964 ccw(c74.644,88.9) U11.1@73.14,88.9 ; R2.2@78.117,94.996 cw(c76.613,94.996) 77.676,93.932 cw(c78.74,92.869) R2.2@78.74,94.373 ; R2.2@78.371,94.996 cw(c77.48,94.996) 78.11,94.366 cw(c78.74,93.736) R2.2@78.74,94.627
VCC: C3.1 C4.2 C6.2 Download.2 L1.2 R1.2 R2.1 R3.1 R4.2 U1.4 U4.7 U4.20 U4.21 U6.16 | length 273.2
  Top Layer w0.5: C6.2@51.943,93.472 54.28,95.809 54.28,97.968 54.61,98.298 57.862,98.298 61.671,102.107 U6.16@63.242,102.107 ; C6.2@51.943,93.984 ccw(c51.943,95.22) 52.817,94.346 ccw(c53.691,93.472) C6.2@52.455,93.472 ; U6.16@62.815,101.842 ccw(c62.174,101.202) 62.174,102.107 ccw(c62.174,103.012) U6.16@62.815,102.372 ; U1.4@80.63,112.793 cw(c79.862,112.025) 80.948,112.025 cw(c82.034,112.025) U1.4@81.266,112.793 ; U1.4@80.948,113.411 80.948,104.878 L1.2@82.372,103.454 82.372,103.2 R1.2@86.055,99.517 ; L1.2@81.86,103.454 ccw(c80.624,103.454) 81.498,104.328 ccw(c82.372,105.202) L1.2@82.372,103.966 ; L1.2@82.372,102.942 cw(c82.372,102.319) 82.813,102.76 ; L1.2@82.884,103.454 ccw(c84.733,103.454) 83.426,102.147 ; R1.2@85.605,99.517 ccw(c84.519,99.517) 85.287,100.285 ccw(c86.055,101.054) R1.2@86.055,99.967 ; R4.2@88.277,99.835 ccw(c87.509,100.604) 88.595,100.604 ccw(c89.682,100.604) R4.2@88.913,99.835 ; R4.2@88.595,99.967 ccw(c88.595,101.054) 89.363,100.285 ccw(c90.132,99.517) R4.2@89.045,99.517 ; v1@92.35,116.916 cw(c91.421,116.916) 92.078,116.259 cw(c92.735,115.602) v1@92.735,116.531 ; v1(92.735,116.916) 90.653,114.833 90.653,103.302 ; C3.1@102.601,103.759 ccw(c101.032,103.759) 102.141,104.869 ccw(c103.251,105.978) C3.1@103.251,104.409 ; C3.1@103.251,103.759 101.651,105.359 92.71,105.359 90.653,103.302 ; U4.21@140.716,81.534 143.256,84.074 U4.7@143.256,89.154 ; U4.21@140.716,82.034 ccw(c140.716,83.241) 141.57,82.388 ccw(c142.423,81.534) U4.21@141.216,81.534 ; U4.7@142.902,88.8 cw(c142.049,87.947) 143.256,87.947 cw(c144.463,87.947) U4.7@143.61,88.8 ; 90.653,103.302 90.653,101.575 R4.2@88.595,99.517 88.595,101.244 90.653,103.302
  Bottom Layer w0.5: U6.16@63.242,102.107 83.465,102.107 R1.2@86.055,99.517 ; U6.16@63.67,101.842 cw(c64.31,101.202) 64.31,102.107 cw(c64.31,103.012) U6.16@63.67,102.372 ; R2.1@76.2,94.996 80.721,99.517 R1.2@86.055,99.517 ; R2.1@76.2,95.496 ccw(c76.2,96.703) 77.054,95.85 ccw(c77.907,94.996) R2.1@76.7,94.996 ; R1.2@85.605,99.517 ccw(c84.519,99.517) 85.287,100.285 ccw(c86.055,101.054) R1.2@86.055,99.967 ; R1.2@85.737,99.199 ccw(c84.969,98.431) 84.969,99.517 ccw(c84.969,100.604) R1.2@85.737,99.835 ; R1.2@86.373,99.199 cw(c87.142,98.431) 87.142,99.517 cw(c87.142,100.604) R1.2@86.373,99.835 ; R4.2@88.277,99.199 ccw(c87.509,98.431) 87.509,99.517 ccw(c87.509,100.604) R4.2@88.277,99.835 ; R4.2@88.595,99.517 R1.2@86.055,99.517 ; v1(92.735,116.916) 94.285,116.916 ; v1@93.008,116.644 cw(c93.665,115.987) 93.665,116.916 cw(c93.665,117.846) v1@93.008,117.188 ; Download.2@94.501,116.273 ccw(c93.746,116.378) 94.285,116.916 ; Download.2@94.928,116.7 cw(c94.823,117.455) 94.285,116.916 ; Download.2@94.996,116.205 94.285,116.916 ; C3.1@103.251,103.759 105.715,103.759 105.791,103.835 C4.2@108.28,103.835 118.44,93.675 149.555,93.675 R3.1@150.876,94.996 167.183,94.996 167.894,94.285 167.894,89.713 165.456,87.274 145.136,87.274 U4.7@143.256,89.154 ; C3.1@103.711,103.299 cw(c104.82,102.19) 104.82,103.759 cw(c104.82,105.328) C3.1@103.711,104.219 ; C4.2@107.927,103.482 ccw(c107.073,102.628) 107.073,103.835 ccw(c107.073,105.042) C4.2@107.927,104.189 ; C4.2@108.28,103.335 cw(c108.28,102.128) 109.134,102.982 cw(c109.987,103.835) C4.2@108.78,103.835 ; U4.20@138.176,81.534 U4.21@140.716,81.534 ; U4.20@138.53,81.18 cw(c139.383,80.327) 139.383,81.534 cw(c139.383,82.741) U4.20@138.53,81.888 ; U4.21@140.362,81.18 ccw(c139.509,80.327) 139.509,81.534 ccw(c139.509,82.741) U4.21@140.362,81.888 ; U4.7@143.256,88.654 cw(c143.256,87.447) 144.11,88.3 cw(c144.963,89.154) U4.7@143.756,89.154 ; R3.1@150.376,94.996 cw(c149.169,94.996) 150.022,94.142 cw(c150.876,93.289) R3.1@150.876,94.496 ; R3.1@151.23,94.642 cw(c152.083,93.789) 152.083,94.996 cw(c152.083,96.203) R3.1@151.23,95.35
pads on no net: ?.0 Download.3 J1.1 J1.4 J1.6 J1.7 J1.8 J1.9 J1.10 J1.11 K1.2 K2.2 K3.2 K4.2 K5.2 K6.2 K7.2 K8.2 KEY1.3 KEY1.4 U6.7 U6.8 U6.9 U6.10

## Polygon pours and split planes (outlines as drawn)
no net on Top Layer (hatched 45Degree grid 0.508 track 0.203): 36.824,120.569 35.304,119.045 35.304,78.151 36.317,77.135 168.911,77.135 169.164,77.389 169.164,118.791 167.518,120.442 36.824,120.442
no net on Bottom Layer (hatched 45Degree grid 0.508 track 0.203): 37.856,120.612 36.708,120.612 35.306,119.215 35.306,78.321 36.326,77.305 168.909,77.305 169.164,77.559 169.164,118.961 167.507,120.612

## Silkscreen, mask and mechanical layers (free items; w line width, h text height)
Top Overlay:
  text "GND" at 49.911,120.523 h1.02 r180
  text "VCC" at 55.626,120.523 h1.02 r180
  text "GND" at 118.11,119.38 h1.02 r180
  text "IN8" at 123.317,119.38 h1.02 r180
  text "IN7" at 128.27,119.38 h1.02 r180
  text "IN6" at 133.35,119.38 h1.02 r180
  text "IN5" at 138.43,119.38 h1.02 r180
  text "IN4" at 143.637,119.38 h1.02 r180
  text "IN3" at 148.463,119.38 h1.02 r180
  text "IN2" at 153.67,119.38 h1.02 r180
  text "IN1" at 158.623,119.38 h1.02 r180
Mechanical 1:
  lines w0.4: 34.544,36.83 36.449,34.925 167.894,34.925 169.799,36.83 169.799,119.38 167.894,121.285 36.322,121.412 34.544,119.634 34.58,36.794

## Text inside footprints (layer, text, board x,y; h text height)
Download: Top Overlay "10" at 106.68,115.697 h1.02; Top Overlay "9" at 106.68,113.157 h1.02; Top Overlay "1" at 91.44,113.538 h1.02; Top Overlay "2" at 92.456,115.697 h1.02
J1: Top Overlay "6" at 40.281,88.309 h1.02 r90; Top Overlay "9" at 40.281,96.619 h1.02 r90; Top Overlay "5" at 46.736,100.711 h1.02 r90; Top Overlay "1" at 46.99,84.455 h1.02 r90